# Altium PCB RPI 3.PcbDoc
Units mil, origin at the board's own origin, x right, y up, seen from the top; angles counter-clockwise.
Board outline 2558.74 x 2204.72 mil, 2 copper layers (Top Layer, Bottom Layer), stack 61.2 mil thick; 12 components, 18 nets, 81 pads, 0 vias.
Unrouted connection lines stored in the file: 19.
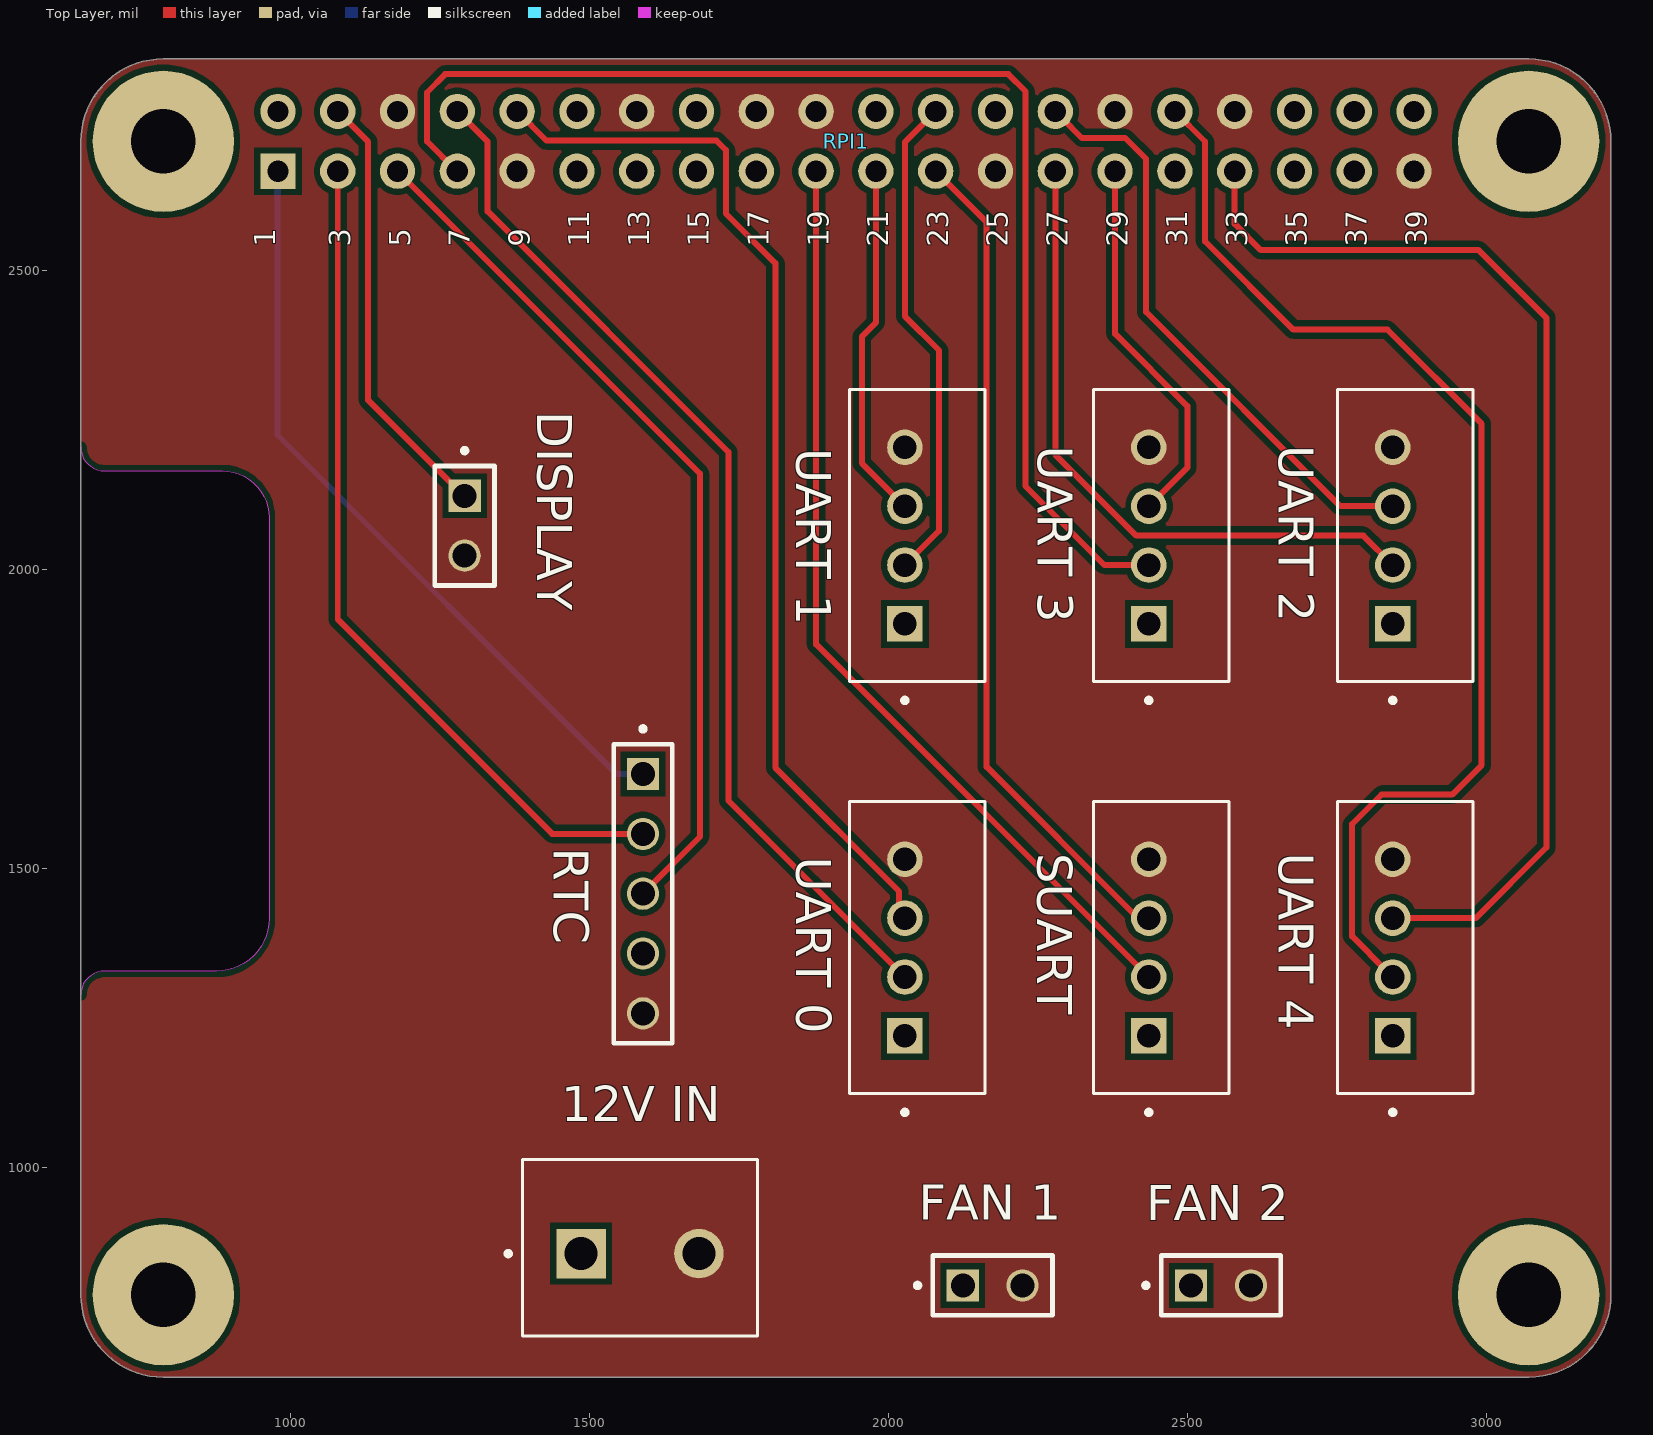
[diagram p0: Top Layer view]
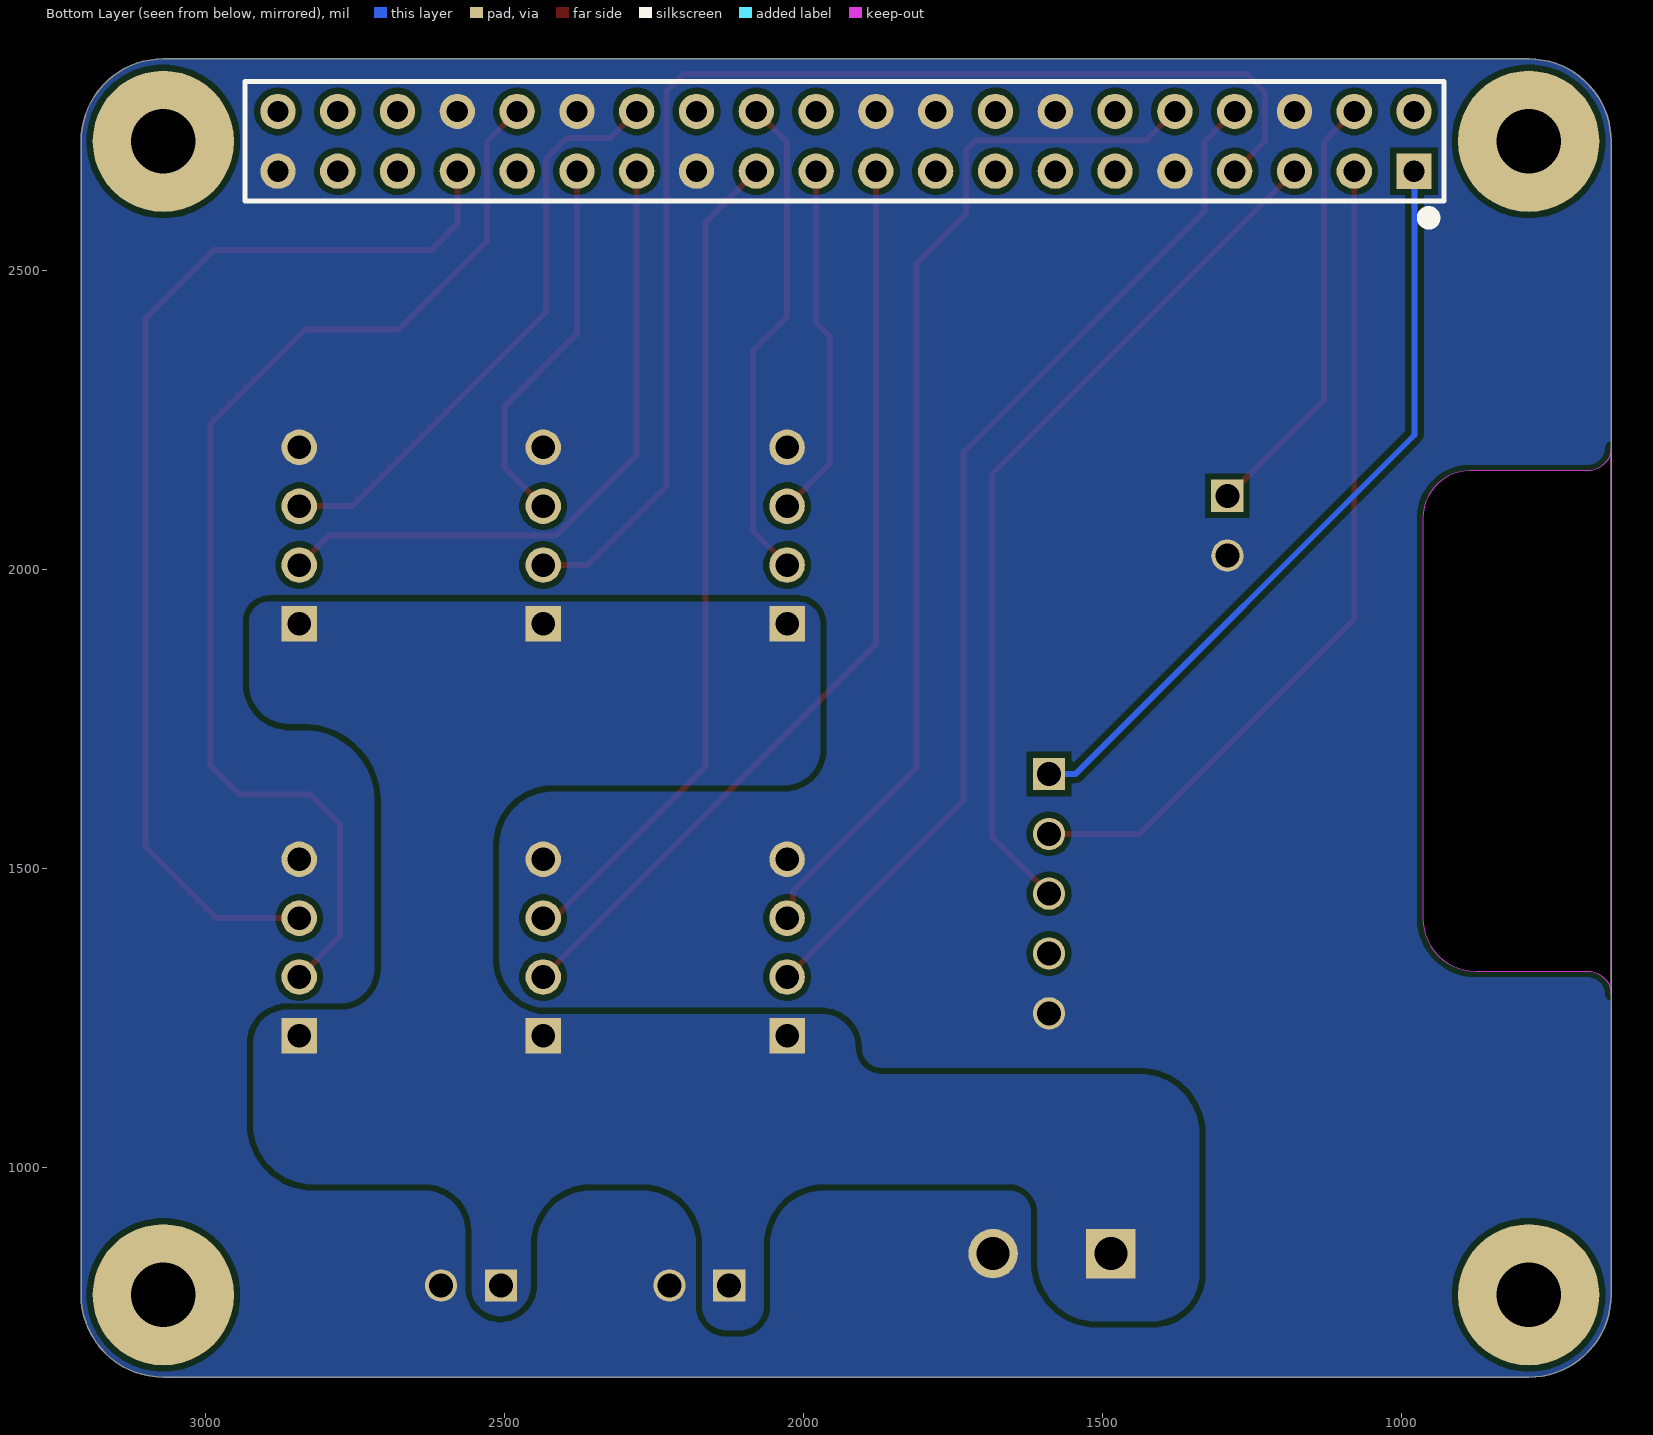
[diagram p1: Bottom Layer view, seen from below]

## Layer stack, top to bottom
Top Solder: solder mask 0.8, Solder Resist, Dk 3.5
Top Layer: signal copper 2.1
Dielectric 1: dielectric 57, FR-4, Dk 4.6
Bottom Layer: signal copper 2.1
Bottom Solder: solder mask 0.8, Solder Resist, Dk 3.5

## Board outline
649.61,787.4 ccw(c787.4,787.4) 787.4,649.61 3070.87,649.61 ccw(c3070.71,787.24) 3208.35,787.4 3208.35,2716.54 ccw(c3070.71,2716.69) 3070.87,2854.33 787.4,2854.33 ccw(c787.4,2716.54) 649.61,2716.54
cut-out: 649.61,1289.37 649.61,2204.72 ccw(c688.98,2204.72) 688.98,2165.35 885.83,2165.35 cw(c885.83,2086.61) 964.57,2086.61 964.57,1417.32 cw(c875.99,1417.32) 875.98,1328.74 688.98,1328.74 ccw(c688.97,1289.37)

## Design rules (kind name [scope] priority, off if disabled: settings)
Clearance [All] p1: gap=10 ignorepadtopadclearanceinfootprint=FALSE except(0: Arc-Hole Track-Hole SMDPad-Hole THPad-Hole Via-Hole Fill-Hole Poly-Hole Region-Hole Text-Hole)
PlaneClearance [All] p1: clearance=50
PolygonConnect [All] p1: connectstyle=Direct reliefconductorwidth=10 reliefentries=4 polygonreliefangle="90 Angle" airgapwidth=10
RoutingVias [All] p1: holewidth=28 width=50 viastyle="Through Hole" minholewidth=28 minwidth=50 maxholewidth=28 maxwidth=50
SolderMaskExpansion [All] p1: expansion=4 istentingtop=FALSE
Width [All] p1: maxlimit=60 minlimit=10 preferedwidth=10
29 further rules are at their usual default settings.

## Components (designator, comment, footprint, x,y, rotation, side; value= is the part's Value field where it differs from the comment)
"12V IN" "12V-IN" HANDSON_KF301-2P 1584.65,856.3 r0 top (schematic designator J8)
DISPLAY "DP" SAMTEC_TSW-102-24-L-S 1291.34,2123.62 r270 top (schematic designator J2)
"FAN 1" "FAN-2" SAMTEC_TSW-102-24-L-S 2124.41,803.15 r0 top (schematic designator J11)
"FAN 2" "FAN-1" SAMTEC_TSW-102-24-L-S 2506.3,803.15 r0 top (schematic designator J9)
RPI1 "RPI GPIO Connector" RPI 1929.13,2716.54 r180 top
RTC "RTC" SAMTEC_TLW-105-06-T-S 1589.57,1658.27 r90 top (schematic designator J10)
SUART "UART5" JST_B4B-XH-A(LF)(SN) 2456.2,1368.11 r270 top (schematic designator J7)
"UART 0" "UART0" JST_B4B-XH-A(LF)(SN) 2048.23,1368.11 r270 top (schematic designator J1)
"UART 1" "UART1" JST_B4B-XH-A(LF)(SN) 2048.23,2057.09 r270 top (schematic designator J3)
"UART 2" "UART2" JST_B4B-XH-A(LF)(SN) 2864.17,2057.09 r270 top (schematic designator J4)
"UART 3" "UART3" JST_B4B-XH-A(LF)(SN) 2456.2,2057.09 r270 top (schematic designator J5)
"UART 4" "UART4" JST_B4B-XH-A(LF)(SN) 2864.17,1368.11 r270 top (schematic designator J6)

## Footprints (in the part's own frame and the unit in brackets; to place one, negate y for a bottom-side part, rotate by r counter-clockwise, add the part's x,y. Pads: shape width x height; smd on the part's side, far side on the other; paste and mask are expansions set on the pad)
HANDSON_KF301-2P [mm]
  rect 2.1x2.1 hole 1.4: 1(-2.5,0)
  round 2.1 hole 1.4: 2(2.5,0)
  silkscreen extent -5.7,-3.5 5,4, body extent -5.55,-3.31 5.05,4.19, height 10
JST_B4B-XH-A(LF)(SN) [mm]
  rect 1.508x1.508 / inner round 1.508 / far side rect 1.508x1.508 hole 1: 1(3.75,-0.525)
  round 1.508 hole 1: 2(1.25,-0.525) 3(-1.25,-0.525) 4(-3.75,-0.525)
  silkscreen extent -6.2,-2.88 7.1,2.88, body extent -6.2,-2.88 6.2,2.88, height 7
RPI [mm]
  rect 1.5x1.5 hole 0.9: 1(24.13,1.27)
  round 1.5 hole 0.9: 2(24.13,-1.27) 3(21.59,1.27) 4(21.59,-1.27) 5(19.05,1.27) 6(19.05,-1.27) 7(16.51,1.27) 8(16.51,-1.27) 9(13.97,1.27) 10(13.97,-1.27) 11(11.43,1.27) 12(11.43,-1.27) 13(8.89,1.27) 14(8.89,-1.27) 15(6.35,1.27) 16(6.35,-1.27) 17(3.81,1.27) 18(3.81,-1.27) 19(1.27,1.27) 20(1.27,-1.27) 21(-1.27,1.27) 22(-1.27,-1.27) 23(-3.81,1.27) 24(-3.81,-1.27) 25(-6.35,1.27) 26(-6.35,-1.27) 27(-8.89,1.27) 28(-8.89,-1.27) 29(-11.43,1.27) 30(-11.43,-1.27) 31(-13.97,1.27) 32(-13.97,-1.27) 33(-16.51,1.27) 34(-16.51,-1.27) 35(-19.05,1.27) 36(-19.05,-1.27) 37(-21.59,1.27) 38(-21.59,-1.27) 39(-24.13,1.27) 40(-24.13,-1.27)
  body extent -25.52,-2.63 25.53,2.38, height 8.5
SAMTEC_TLW-105-06-T-S [mm]
  rect 1.37x1.37 hole 1.02: 01(0,0)
  round 1.37 hole 1.02: 02(-2.54,0) 03(-5.08,0) 04(-7.62,0) 05(-10.16,0)
  silkscreen extent -11.43,-1.24 2.02,1.24, body extent -11.43,-1.42 1.27,11.58, height 16.75
SAMTEC_TSW-102-24-L-S [mm]
  rect 1.37x1.37 hole 1.02: 01(0,0)
  round 1.37 hole 1.02: 02(2.54,0)
  silkscreen extent -2.02,-1.27 3.81,1.27, body extent -1.4,-1.27 3.81,1.27, height 9.27

## Part data
"12V IN": library part KF301-2P, "2 Pin Terminal Block 5mm Pitch", Package=None, Availability=Unavailable, MP=KF301-2P, Price=None
DISPLAY "FAN 1" "FAN 2": library part TSW-102-24-L-S, "Connector Header Through Hole 2 position 0.100 (2.54mm)", Package=None, Availability=Bad, BuyPart=https://www.snapeda.com/parts/TSW-102-24-L-S/Samtec%20Inc./view-part/930762/?ref=eda, MF=Samtec, MP=TSW-102-24-L-S, Price=None, SnapEDA_Link=https://www.snapeda.com/parts/TSW-102-24-L-S/Samtec%20Inc./view-part/930762/?ref=snap, Toby_UK-Purchase-URL=https://snapeda.com/shop?store=Toby+UK&id=930762
RPI1: library part "rpi connector", "GPIO Header for Raspberry Pi A+/B+/Pi 2/Pi 3 - 2x20", Manufacturer="SparkFun Electronics", Manufacturer Part Number=PRT-14017, Supplier Part Number 1=1568-1462-ND, Accessory Type=Connector, Category="Development Boards, Kits, Programmers", ComponentLink1Description=https://cdn.sparkfun.com/datasheets/Dev/RaspberryPi/12313.pdf, ComponentLink1URL=https://cdn.sparkfun.com/datasheets/Dev/RaspberryPi/12313.pdf, For Use With/Related Products="Raspberry Pi", Nils Minor=author, nilsminor@web.de=mail, Part Status=Active, Pricing 1="1=1.84 (EUR)", RoHS="RoHS Compliant", Stock 1=150, Supplier 1=Digi-Key
RTC: library part TLW-105-06-T-S, Package=None, Availability=Unavailable, MP=TLW-105-06-T-S, Price=None
SUART "UART 0" "UART 1" "UART 2" "UART 3" "UART 4": library part B4B-XH-A(LF)(SN), "Connector Header Through Hole 4 position 0.098 (2.50mm)", Package=None, Check_prices=https://www.snapeda.com/parts/B4B-XH-A(LF)(SN)/JST+Sales+America+Inc./view-part/?ref=eda, MF="JST Sales", MP=B4B-XH-A(LF)(SN), SnapEDA_Link=https://www.snapeda.com/parts/B4B-XH-A(LF)(SN)/JST+Sales+America+Inc./view-part/?ref=snap

## Free pads (board coordinates)
  round 236.22 hole 108.27: ""(787.4,787.4) ""(787.4,2716.54) ""(3070.87,787.4) ""(3070.87,2716.54)

## Nets (pads, with @x,y where several pads share a name; then routed paths per layer and width w, separated by ;. In a path a pad name is that pad's centre, name@x,y a point inside that pad or via, vN(x,y) a via of type N, cw(c..) or ccw(c..) an arc to the next point about the centre after c; other vN are vias at no path point)
3V3: RPI1.1 RTC.01 | length 1287.1
  Bottom Layer w10: RPI1.1@978.35,2666.34 978.35,2225.39 1545.47,1658.27 RTC.01
+5: DISPLAY.01 RPI1.4 | length 723.6
  Top Layer w10: RPI1.4 1129.92,2715.75 1129.92,2283.46 1279.53,2133.86 DISPLAY.01@1279.53,2125.98
+12: "12V IN.1" "FAN 1.01" "FAN 2.01" "UART 0.1" "UART 1.1" "UART 2.1" "UART 3.1" "UART 4.1" SUART.1
GND: "12V IN.2" "FAN 1.02" "FAN 2.02" "UART 0.4" "UART 1.4" "UART 2.4" "UART 3.4" "UART 4.4" DISPLAY.02 RPI1.6 RPI1.9 RPI1.14 RPI1.18 RPI1.20 RPI1.25 RPI1.30 RPI1.34 RPI1.39 RTC.05 SUART.4
RTC_SCL: RPI1.5 RTC.03 | length 1459.3
  Top Layer w10: RPI1.5 1685.04,2160.63 1685.04,1553.74 1591.93,1460.63 RTC.03@1586.61,1460.63
RTC_SDA: RPI1.3 RTC.02 | length 1408.6
  Top Layer w10: RPI1.3 1079.13,1916.93 1437.8,1558.27 RTC.02
U0_RX: "UART 0.3" RPI1.10 | length 1784.4
  Top Layer w10: RPI1.10 1428.15,2717.52 1712.6,2717.52 1728.35,2701.77 1728.35,2595.47 1811.02,2512.8 1811.02,1669.09 2018.11,1462 2018.11,1426.77 2027.56,1417.32
U0_TX: "UART 0.2" RPI1.8 | length 1755.9
  Top Layer w10: RPI1.8@1281.5,2765.75 1281.5,2764.17 1329.72,2715.94 1329.72,2599.41 1732.28,2196.85 1732.28,1614.17 2027.56,1318.9
U1_RX: "UART 1.3" RPI1.21 | length 599.7
  Top Layer w10: RPI1.21 1979.13,2413.19 1955.71,2389.76 1955.71,2178.15 2027.56,2106.3
U1_TX: "UART 1.2" RPI1.24 | length 811.6
  Top Layer w10: 2027.56,2007.87 2084.65,2064.96 2084.65,2367.04 2027.56,2424.13 2027.56,2714.96 2066.93,2754.33 RPI1.24@2066.93,2755.91
U2_RX: "UART 2.3" RPI1.28 | length 988.9
  Top Layer w10: RPI1.28@2273.62,2755.91 2289.76,2755.91 2323.66,2722.01 2396.1,2722.01 2431.1,2687.01 2431.1,2431.1 2755.91,2106.3 2843.5,2106.3
U2_TX: "UART 2.2" RPI1.27 | length 1114.8
  Top Layer w10: RPI1.27 2279.13,2192.56 2414.6,2057.09 2794.29,2057.09 2843.5,2007.87
U3_RX: "UART 3.3" RPI1.29 | length 635
  Top Layer w10: RPI1.29@2379.13,2664.57 2379.13,2394.49 2500,2273.62 2500,2170.77 2435.53,2106.3
U3_TX: "UART 3.2" RPI1.7 | length 2098
  Top Layer w10: RPI1.7@1277.56,2667.32 1228.35,2716.54 1228.35,2798.23 1258.86,2828.74 2200.79,2828.74 2229.33,2800.2 2229.33,2139.76 2361.22,2007.87 2435.53,2007.87
U4_RX: "UART 4.3" RPI1.33 | length 1866.2
  Top Layer w10: RPI1.33 2579.13,2578.35 2622.94,2534.54 2987.11,2534.54 3100.39,2421.26 3100.39,1535.43 2982.28,1417.32 2843.5,1417.32
U4_TX: "UART 4.2" RPI1.32 | length 1936.3
  Top Layer w10: RPI1.32 2529.53,2716.14 2529.53,2549.21 2677.17,2401.57 2834.65,2401.57 2992.13,2244.09 2992.13,1673.23 2942.91,1624.02 2824.8,1624.02 2775.59,1574.8 2775.59,1386.81 2833.66,1328.74 2844.49,1328.74
U5_RX: RPI1.23 SUART.3 | length 1407.5
  Top Layer w10: RPI1.23 2164.37,2581.3 2164.37,1670.28 2407.88,1426.77 2426.09,1426.77 SUART.3
U5_TX: RPI1.19 SUART.2 | length 1579.2
  Top Layer w10: RPI1.19@1879.92,2667.32 RPI1.19 1879.13,1875.3 SUART.2
pads on no net: RPI1.2 RPI1.11 RPI1.12 RPI1.13 RPI1.15 RPI1.16 RPI1.17 RPI1.22 RPI1.26 RPI1.31 RPI1.35 RPI1.36 RPI1.37 RPI1.38 RPI1.40 RTC.04

## Polygon pours and split planes (outlines as drawn)
GND on Bottom Layer "GND_L02_P005" (solid, pour order 5): 649.61,2716.54 cw(c787.4,2716.54) 787.4,2854.33 3070.87,2854.33 cw(c3070.87,2716.54) 3208.66,2716.53 3208.66,787.4 cw(c3070.87,787.4) 3070.87,649.61 787.4,649.61 cw(c787.4,787.4) 649.61,787.4 649.61,2362.2
+12 on Bottom Layer "+12_L02_P002" (solid, pour order 2): 2356.69,972.44 cw(c2356.69,872.44) 2456.69,872.44 2456.69,803.15 ccw(c2507.87,803.15) 2507.87,751.97 ccw(c2507.87,799.21) 2555.12,799.21 2555.12,893.7 cw(c2633.86,893.7) 2633.86,972.44 2820.28,972.44 ccw(c2820.28,1072.44) 2920.28,1072.44 2920.28,1208.66 ccw(c2865.16,1208.66) 2865.16,1263.78 2775.59,1263.78 cw(c2775.59,1332.68) 2706.69,1332.68 2706.69,1613.19 cw(c2835.63,1613.19) 2835.63,1742.13 2860.24,1742.13 ccw(c2860.24,1809.05) 2927.17,1809.06 2927.17,1913.39 ccw(c2893.7,1913.39) 2893.7,1946.85 2009.84,1946.85 ccw(c2009.84,1909.45) 1972.44,1909.45 1972.44,1699.21 ccw(c2031.89,1699.21) 2031.89,1639.76 2419.68,1639.76 cw(c2419.69,1539.76) 2519.68,1539.76 2519.68,1351.97 cw(c2429.82,1346.75) 2435.04,1256.89 1969.49,1256.89 ccw(c1969.49,1200.79) 1913.39,1200.79 cw(c1869.1,1200.79) 1869.09,1156.5 1438.58,1156.5 ccw(c1438.58,1056.5) 1338.58,1056.5 1338.58,821.85 ccw(c1417.32,821.85) 1417.32,743.11 1509.25,743.11 ccw(c1509.25,843.11) 1609.25,843.11 1609.25,925.2 cw(c1656.5,925.2) 1656.5,972.44 1966.93,972.44 cw(c1966.93,872.44) 2066.93,872.44 2066.93,767.72 ccw(c2106.3,767.72) 2106.3,728.35 2129.92,728.35 ccw(c2129.92,767.72) 2169.29,767.72 2169.29,872.44 cw(c2269.29,872.44) 2269.29,972.44
GND on Top Layer "GND_L01_P000" (solid, pour order 0): 649.61,2716.54 cw(c787.4,2716.54) 787.4,2854.33 3070.87,2854.33 cw(c3070.87,2716.54) 3208.66,2716.53 3208.66,787.4 cw(c3070.87,787.4) 3070.87,649.61 787.4,649.61 cw(c787.4,787.4) 649.61,787.4

## Silkscreen, mask and mechanical layers (free items; w line width, h text height)
Top Overlay:
  text "1" at 975,2540.16 h35 r90
  text "3" at 1100,2540.16 h35 r90
  text "5" at 1200,2540.16 h35 r90
  text "7" at 1300,2540.16 h35 r90
  text "9" at 1400,2540.16 h35 r90
  text "11" at 1500,2540.16 h35 r90
  text "13" at 1600,2540.16 h35 r90
  text "15" at 1700,2540.16 h35 r90
  text "17" at 1800,2540.16 h35 r90
  text "19" at 1900,2540.16 h35 r90
  text "21" at 2000,2540.16 h35 r90
  text "23" at 2100,2540.16 h35 r90
  text "25" at 2200,2540.16 h35 r90
  text "27" at 2300,2540.16 h35 r90
  text "29" at 2400,2540.16 h35 r90
  text "31" at 2500,2540.16 h35 r90
  text "33" at 2600,2540.16 h35 r90
  text "35" at 2700,2540.16 h35 r90
  text "37" at 2800,2540.16 h35 r90
  text "39" at 2900,2540.16 h35 r90
Bottom Overlay:
  circle w19.68: c954.72,2588.58 r9.84
M2: Outline:
  the board outline again, w10